# Altium PCB 03200904张晨06.PcbDoc
Units mil, origin at the board's own origin, x right, y up, seen from the top; angles counter-clockwise.
Board outline 2582.71 x 1795.31 mil, 2 copper layers (Top Layer, Bottom Layer); 37 components, 40 nets, 182 pads, 38 vias.
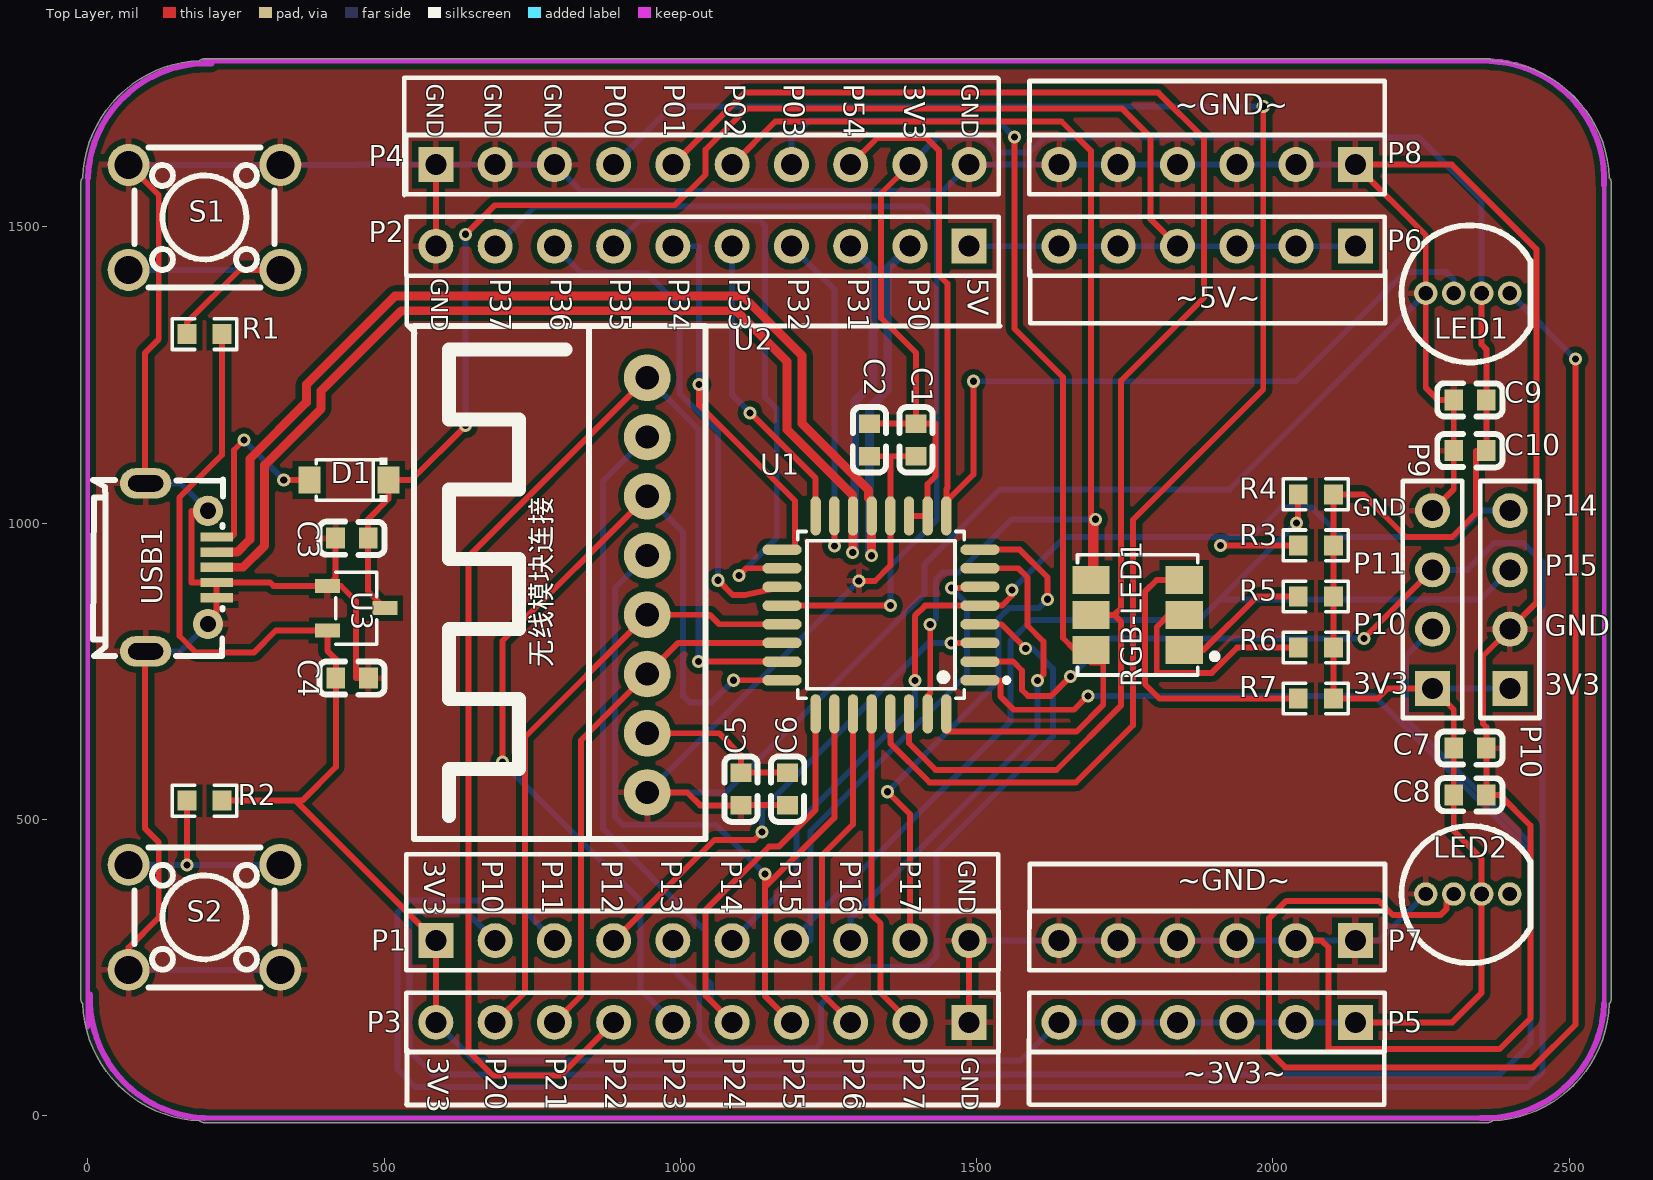
[diagram p0: Top Layer view]
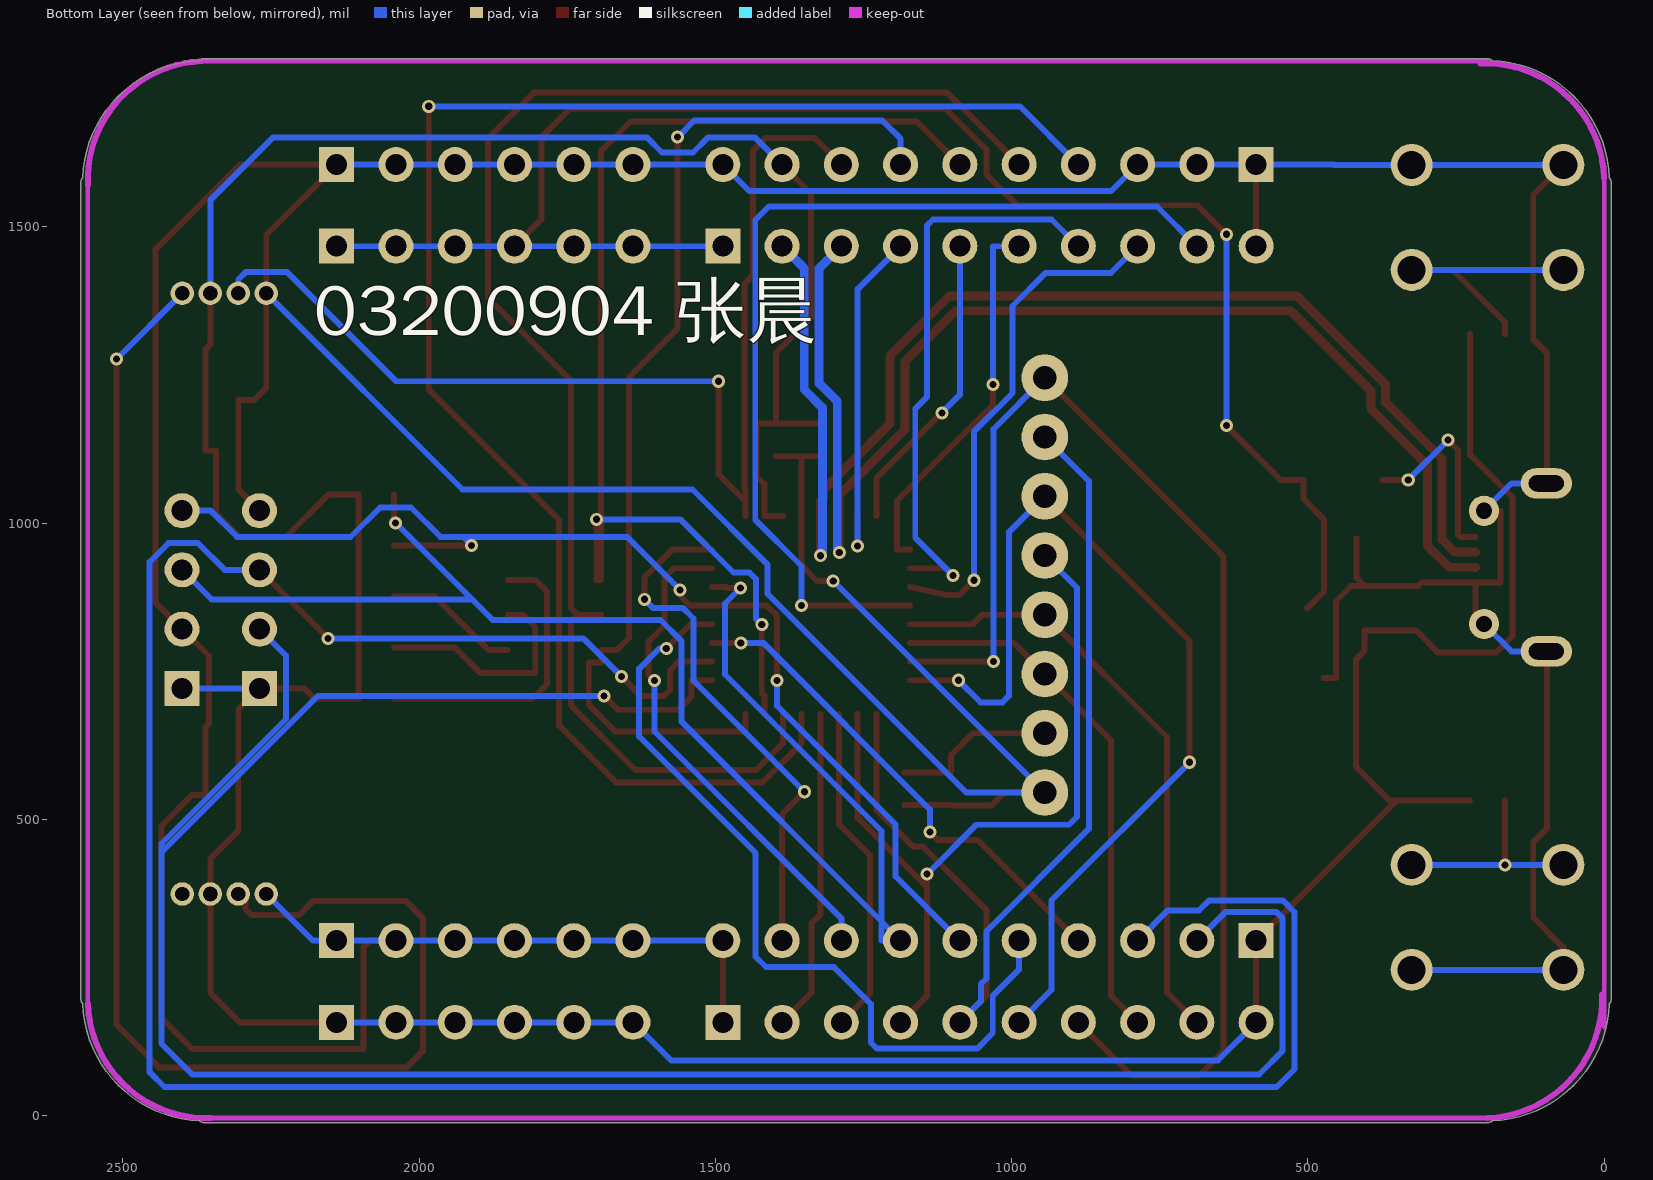
[diagram p1: Bottom Layer view, seen from below]

## Layer stack, top to bottom
Top Solder: solder mask 0.4, Solder Resist, Dk 3.5
Top Layer: signal copper 1.4
Dielectric 1: dielectric 12.6, FR-4, Dk 4.8
Bottom Layer: signal copper 1.4
Bottom Solder: solder mask 0.4, Solder Resist, Dk 3.5

## Board outline
-8.69,188.83 cw(c0,196.85) -11.83,196.85 -11.83,1574.8 cw(c0,1574.8) -8.69,1582.82 cw(c196.85,1574.8) 188.83,1780.35 cw(c196.85,1771.65) 196.85,1783.48 2362.2,1783.48 cw(c2362.2,1771.65) 2370.22,1780.35 cw(c2362.2,1574.8) 2567.75,1582.82 cw(c2559.06,1574.8) 2570.88,1574.8 2570.88,196.85 cw(c2559.06,196.85) 2567.75,188.83 cw(c2362.2,196.85) 2370.22,-8.69 cw(c2362.2,0) 2362.2,-11.83 196.85,-11.83 cw(c196.85,0) 188.83,-8.69 cw(c196.85,196.85)

## Design rules (kind name [scope] priority, off if disabled: settings)
Clearance [All] p1: gap=10 ignorepadtopadclearanceinfootprint=TRUE except(0: Arc-Hole Track-Hole SMDPad-Hole THPad-Hole Via-Hole Fill-Hole Poly-Hole Region-Hole Text-Hole)
DiffPairsRouting [All] p1: maxlimit=10 minlimit=10 mostfreqgap=10 toplayer_minwidth=15 toplayer_maxwidth=15 toplayer_prefwidth=15 bottomlayer_minwidth=15 bottomlayer_maxwidth=15 bottomlayer_prefwidth=15 maxuncoupledlength=500
PolygonConnect [All] p1: connectstyle=Relief reliefconductorwidth=10 reliefentries=4 polygonreliefangle="90 Angle" airgapwidth=10
RoutingVias [All] p1: holewidth=12 width=22 viastyle="Through Hole" minholewidth=12 minwidth=22 maxholewidth=12 maxwidth=22
SolderMaskExpansion [All] p1: expansion=4 istentingtop=FALSE
Width signal [InNetClass('signal')] p1: maxlimit=10 minlimit=10 preferedwidth=10
Width v [InNetClass('vcc')] p2: maxlimit=20 minlimit=10 preferedwidth=15
Width [All] p3: maxlimit=10 minlimit=10 preferedwidth=10
29 further rules are at their usual default settings.

## Classes and differential pairs
differential pair NewDifferentialPair1: +MCU_RXD -MCU_TXD

## Components (designator, comment, footprint, x,y, rotation, side; value= is the part's Value field where it differs from the comment)
C1 "Cap" C0603 1397.64,1140.25 r270 top value=0.1uF
C2 "Cap" C0603 1318.9,1140.25 r270 top value=0.1uF
C3 "Cap" C0603 445.49,974.41 r180 top value=10uF
C4 "Cap" C0603 446.1,738.19 r0 top value=10uF
C5 "Cap" C0603 1102.36,551.18 r90 top value=0.1uF
C6 "Cap" C0603 1181.1,551.18 r90 top value=10uF
C7 "Cap" C0603 2332.68,620.08 r0 top value=0.1uF
C8 "Cap" C0603 2332.68,541.34 r0 top value=0.1uF
C9 "Cap" C0603 2332.68,1207.74 r0 top value=10uF
C10 "Cap" C0603 2332.68,1122.05 r0 top value=10uF
D1 "1N5819W" SOD-123_L2.8-W1.8-LS3.7-RD 440.65,1072.83 r180 top
LED1 "WS2811-F8" WS2811-F8 2399.61,1387.8 r0 top
LED2 "WS2811-F8" WS2811-F8 2399.61,374.02 r0 top
P1 "Header 10" HDR1X10 587.4,295.28 r0 top
P2 "Header 10" HDR1X10 1487.4,1467.16 r180 top
P3 "Header 10" HDR1X10 1487.4,157.48 r180 top
P4 "Header 10" HDR1X10 587.4,1604.95 r0 top
P5 "Header 6" HDR1X6 2138.98,157.48 r180 top
P6 "Header 6" HDR1X6 2138.98,1467.16 r180 top
P7 "Header 6" HDR1X6 2138.98,295.28 r180 top
P8 "Header 6" HDR1X6 2138.98,1604.95 r180 top
P9 "Header 4" HDR1X4 2269.37,721.02 r90 top
P10 "Header 4" HDR1X4 2400,721.02 r90 top
R1 "Res1" R0603 196.85,1318.9 r0 top value=10K
R2 "Res1" R0603 196.85,531.5 r0 top value=10K
R3 "Res1" R0603 2072.33,1048.4 r180 top value=10K
R4 "Res1" R0603 2072.33,962.28 r180 top value=10K
R5 "Res1" R0603 2072.33,876.16 r0 top value=1K
R6 "Res1" R0603 2072.33,790.03 r0 top value=1K
R7 "Res1" R0603 2072.33,703.91 r0 top value=1K
RGB-LED1 "TC5050RGBF20-3CES-AF51" LED-SMD_6P-L5.0-W5.0-FD 1771.65,844.98 r180 top
S1 "SW-PB" SW-PB 196.85,1515.75 r0 top
S2 "SW-PB" SW-PB 196.85,334.65 r180 top
U1 "STC8H1K28-36I-LQFP32" STC8H1K28I-LQFP-32 1338.58,844.98 r90 top
U2 "无线传输模块" 无线传输 944.02,545.23 r0 top
U3 "BL8062CB3TR33" SOT-23-3_L2.9-W1.6-P1.90-LS2.8-BR 452.76,856.3 r180 top
USB1 "MICROXNJ" MICRO-USB-SMD_MICROXNJ 157.48,925.2 r270 top

## Footprints (in the part's own frame and the unit in brackets; to place one, negate y for a bottom-side part, rotate by r counter-clockwise, add the part's x,y. Pads: shape width x height; smd on the part's side, far side on the other; paste and mask are expansions set on the pad)
C0603 [mm]
  rect 0.8x0.9 smd: 1(-0.7,0) 2(0.7,0)
  silkscreen extent -1.41,-0.71 1.39,0.72
HDR1X4 [mm] "Connector; Header; 4 Position"
  rect 1.5x1.5 hole 0.9: 1(0,0)
  round 1.5 hole 0.9: 2(2.54,0) 3(5.08,0) 4(7.62,0)
  silkscreen extent -1.27,-1.27 8.89,1.27
HDR1X6 [mm] "Connector; Header; 6 Position"
  rect 1.5x1.5 hole 0.9: 1(0,0)
  round 1.5 hole 0.9: 2(2.54,0) 3(5.08,0) 4(7.62,0) 5(10.16,0) 6(12.7,0)
  silkscreen extent -1.27,-1.27 13.97,1.27
HDR1X10 [mm] "Connector; Header; 10 Position"
  rect 1.5x1.5 hole 0.9: 1(0,0)
  round 1.5 hole 0.9: 2(2.54,0) 3(5.08,0) 4(7.62,0) 5(10.16,0) 6(12.7,0) 7(15.24,0) 8(17.78,0) 9(20.32,0) 10(22.86,0)
  silkscreen extent -1.27,-1.27 24.13,1.27
LED-SMD_6P-L5.0-W5.0-FD [mm]
  rect 1.6x1.2 smd: 1(-2,1.5) 2(-2,0) 3(-2,-1.5) 4(2.001,-1.5) 5(2.001,0) 6(2.001,1.5)
  silkscreen extent -3.43,-2.58 2.58,2.58
MICRO-USB-SMD_MICROXNJ [mm]
  rect 0.4x1.4 smd: 1(-1.3,1.521) 2(-0.65,1.521) 3(0,1.521) 4(0.65,1.521) 5(1.3,1.521)
  round 1.3 hole 0.7: 6(2.425,1.149) 9(-2.425,1.149)
  oval 1.3x2.2 hole 0.7 slot 1.5 at 90 deg: 7(3.6,-1.521) 8(-3.6,-1.521)
  silkscreen extent -3.76,-3.78 3.8,1.79
R0603 [mil]
  rect 31.75x34.02 smd: 1(-29.66,0) 2(29.65,0)
  silkscreen extent -55,-26 55,26
SOD-123_L2.8-W1.8-LS3.7-RD [mm]
  rect 0.95x1.15 smd: 1(-1.692,0) 2(1.693,0)
  silkscreen extent -1.63,-0.94 1.41,0.94
SOT-23-3_L2.9-W1.6-P1.90-LS2.8-BR [mm]
  rect 1.07x0.6 smd: 1(1.235,-0.95) 2(1.235,0.95) 3(-1.235,0)
  silkscreen extent -0.88,-1.54 0.88,1.54
STC8H1K28I-LQFP-32 [mm] "LQFP-32_L7.0-W7.0-P0.80-LS9.0-BL"
  oval 0.448x1.684 smd: 1(-2.8,-4.242) 2(-2,-4.242) 3(-1.2,-4.242) 4(-0.4,-4.242) 5(0.4,-4.242) 6(1.2,-4.242) 7(2,-4.242) 8(2.8,-4.242) 17(2.8,4.242) 18(2,4.242) 19(1.2,4.242) 20(0.4,4.242) 21(-0.4,4.242) 22(-1.2,4.242) 23(-2,4.242) 24(-2.8,4.242)
  oval 1.684x0.448 smd: 9(4.242,-2.8) 10(4.242,-2) 11(4.242,-1.2) 12(4.242,-0.4) 13(4.242,0.4) 14(4.242,1.2) 15(4.242,2) 16(4.242,2.8) 25(-4.242,2.8) 26(-4.242,2) 27(-4.242,1.2) 28(-4.242,0.4) 29(-4.242,-0.4) 30(-4.242,-1.2) 31(-4.242,-2) 32(-4.242,-2.8)
  silkscreen extent -3.58,-5.48 3.58,3.58
SW-PB [mm] "SW-TH_4P-L6.0-W6.0-P4.50-LS6.5"
  round 1.8 hole 1.2: 1(-3.25,2.25) 1(3.25,2.25) 2(-3.25,-2.25) 2(3.25,-2.25)
  silkscreen extent -3,-3 3,3
WS2811-F8 [mm]
  round 1 hole 0.61 paste+0: 1(0,0) 3(-2.4,0) 4(-3.6,0)
  round 1 hole 0.61 slot 0.62 at 0 deg paste+0: 2(-1.2,0)
  silkscreen extent -4.64,-2.97 0.89,2.91
无线传输 [mm]
  round 2 hole 1 paste+0: 1(0,0) 2(0,2.54) 3(0,5.08) 4(0,7.62) 5(0,10.16) 6(0,12.7) 7(0,15.24) 8(0,17.78)
  silkscreen extent -10,-2 2.5,20

## Part data
C1 C2 C3 C4 C5 C6 C7 C8 C9 C10: "Capacitor", LatestRevisionDate=17-Jul-2002, LatestRevisionNote="Re-released for DXP Platform.", PackageDescription="Radial Cap, Thru-Hole; 2 Leads; 0.3 in Pin Spacing", PackageReference=RAD-0.3, Published=8-Jun-2000, Publisher="Altium Limited"
D1: library part 1N5819W_C727115, BOM_JLCPCB Part Class="Extended Part", BOM_Manufacturer=TWGMC, BOM_Manufacturer Part=1N5819W, BOM_Supplier=LCSC, BOM_Supplier Part=C727115, Contributor=LCSC, spicePre=D, spiceSymbolName=1N5819W_C727115
P1 P2 P3 P4: "Header, 10-Pin", LatestRevisionDate=17-Jul-2002, LatestRevisionNote="Re-released for DXP Platform.", Publisher="Altium Limited"
P5 P6 P7 P8: "Header, 6-Pin", LatestRevisionDate=17-Jul-2002, LatestRevisionNote="Re-released for DXP Platform.", Publisher="Altium Limited"
P9 P10: "Header, 4-Pin", LatestRevisionDate=17-Jul-2002, LatestRevisionNote="Re-released for DXP Platform.", Publisher="Altium Limited"
R1 R2 R3 R4 R5 R6 R7: library part Res, "Resistor", LatestRevisionDate=17-Jul-2002, LatestRevisionNote="Re-released for DXP Platform.", PackageDescription="Axial Device, Thru-Hole; 2 Leads; 0.3 in Pin Spacing", PackageReference=AXIAL-0.3, Published=8-Jun-2000, Publisher="Altium Limited"
RGB-LED1: BOM_JLCPCB Part Class="Extended Part", BOM_Manufacturer=TCWIN, BOM_Manufacturer Part=TC5050RGBF20-3CES-AF51, BOM_Supplier=LCSC, BOM_Supplier Part=C784541, Contributor=LCSC, spicePre=L, spiceSymbolName=TC5050RGBF20-3CES-AF51
S1 S2: "Switch", LatestRevisionDate=17-Jul-2002, LatestRevisionNote="Re-released for DXP Platform.", PackageDescription="Switch; 2 Leads", PackageReference=SPST-2, Published=24-Mar-1999, Publisher="Altium Limited"
U1: BOM_JLCPCB Part Class="Extended Part", BOM_Manufacturer="STC Micro", BOM_Manufacturer Part=STC8H1K28-36I-LQFP32, BOM_Supplier=LCSC, BOM_Supplier Part=C914618, Contributor=LCSC, spicePre=U, spiceSymbolName=STC8H1K28-36I-LQFP32
U3: BOM_JLCPCB Part Class="Extended Part", BOM_Manufacturer="BL(Shanghai Belling)", BOM_Manufacturer Part=BL8062CB3TR33, BOM_Supplier=LCSC, BOM_Supplier Part=C692265, Contributor=LCSC, spicePre=U, spiceSymbolName=BL8062CB3TR33
USB1: BOM_JLCPCB Part Class="Extended Part", BOM_Manufacturer="SHOU HAN", BOM_Manufacturer Part=MicroXNJ, BOM_Supplier=LCSC, BOM_Supplier Part=C404969, Contributor=LCSC, spicePre=U, spiceSymbolName=MICROXNJ

## Via types
v1: diameter 22, hole 12, Top Layer to Bottom Layer, 38 vias

## Nets (pads, with @x,y where several pads share a name; then routed paths per layer and width w, separated by ;. In a path a pad name is that pad's centre, name@x,y a point inside that pad or via, vN(x,y) a via of type N, cw(c..) or ccw(c..) an arc to the next point about the centre after c; other vN are vias at no path point)
+3.3V: C1.1 C2.1 C4.1 C7.1 C8.1 C9.2 C10.2 LED1.2 LED2.2 P1.1 P3.10 P4.9 P5.1 P5.2 P5.3 P5.4 P5.5 P5.6 P9.1 P10.1 R1.2 R2.2 R3.1 R4.1 R5.2 R6.2 R7.2 U1.10 U1.11 U3.2 | length 7447.6
  Top Layer w10: R2.2 351.18,531.5 ; R1.2 226.51,1115.17 154.68,1043.35 154.68,809.35 182.68,781.35 280.13,781.35 317.68,818.9 U3.2 404.14,784.75 418.55,770.35 C4.1 418.55,588.35 361.7,531.5 351.18,531.5 ; P3.10 P1.1 351.18,531.5 ; C2.1 C1.1 ; U1.11 U1.10 1417.32,1065.92 1430.68,1079.28 1430.68,1167.81 C1.1 ; P4.9 1338.68,1556.23 1338.68,1346.31 1397.64,1287.35 C1.1 ; P5.1 2302.68,157.48 2352.36,207.17 LED2.2 2352.36,433.35 2305.12,480.59 C8.1 C7.1 2305.12,685.27 P9.1 2193.79,721.02 2176.68,703.91 R7.2 R6.2 R5.2 R4.1 R3.1 2152.62,1048.4 2224.68,976.35 2302.68,976.35 2342.68,1016.35 2342.68,1122.05 C10.2 C9.2 2360.23,1293.35 2352.36,1301.22 LED1.2
  Bottom Layer w10: P3.10 651.93,92.95 1574.45,92.95 P5.6 P5.5 P5.4 P5.3 P5.2 P5.1 ; P4.9 1432.79,1650.35 1512.68,1650.35 1537.68,1625.35 1590.17,1625.35 1615.17,1650.35 2246.68,1650.35 2352.36,1544.66 LED1.2 ; P9.1 P10.1
+5: C3.1 D1.1 P2.1 P6.1 P6.2 P6.3 P6.4 P6.5 P6.6 U3.3 | length 2876.6
  Top Layer w10: U3.3 473.05,884.63 C3.1 473.05,1006.35 507.28,1040.58 D1.1 546.17,1072.83 v1(637.68,1164.35) ; v1(637.68,1487.35) 686.68,1536.35 990.68,1536.35 1042.68,1588.35 1042.68,1630.35 1111.68,1699.35 1745.68,1699.35 1793.68,1651.35 1793.68,1512.46 P6.4
  Bottom Layer w10: v1(637.68,1164.35) v1(637.68,1487.35) ; P2.1 P6.6 P6.5 P6.4 P6.3 P6.2 P6.1
GND: C1.2 C2.2 C3.2 C4.2 C5.1 C6.1 C7.2 C8.2 C9.1 C10.1 LED1.4 LED2.4 P1.10 P2.10 P3.1 P4.1 P4.2 P4.3 P4.10 P7.1 P7.2 P7.3 P7.4 P7.5 P7.6 P8.1 P8.2 P8.3 P8.4 P8.5 P8.6 P9.4 P10.2 S1.1 S2.1 U1.12 U2.1 U3.1 USB1.4 USB1.5 USB1.6 USB1.7 USB1.8 USB1.9 | length 11377.9
  Top Layer w10: S2.1@68.9,246.06 68.9,283.57 119.68,334.35 119.68,461.35 96.68,484.35 96.68,783.47 USB1.7 ; S1.1@68.9,1604.33 119.68,1553.55 119.68,1310.35 96.68,1287.35 96.68,1066.93 USB1.8 ; USB1.6 217.38,844.39 USB1.5 USB1.4 ; USB1.9 174.68,1020.67 174.68,899.61 USB1.4 ; C3.2 417.94,907.5 U3.1 ; C4.2 452.68,738.19 452.68,868.35 427.32,893.7 U3.1 ; P2.10 P4.1 ; U2.1 1011.68,545.23 1033.28,523.63 C5.1 1102.36,524.35 1181.1,524.35 C6.1 ; v1(1301.14,902.35) 1328.33,902.35 1354.33,928.35 U1.12 1354.33,1109.35 1357.68,1112.7 ; C2.2 1357.68,1112.7 ; C1.2 1357.68,1112.7 ; P3.1 P1.10 ; P7.2 2082.68,295.28 2093.68,284.28 2093.68,112.35 2382.68,112.35 2434.68,164.35 2434.68,489.34 2382.68,541.34 C8.2 C7.2 2360.23,655.79 2354.68,661.35 2354.68,775.7 P10.2 2444.68,865.7 2444.68,1462.35 2302.07,1604.95 P8.1 2257.87,1486.06 LED1.4 2257.87,1228.15 2278.29,1207.74 C9.1 C10.1 2305.12,1056.78 P9.4 ; USB1.4 307.68,899.61 313.59,893.7 U3.1
  Bottom Layer w10: S2.1@68.9,246.06 S2.1@324.8,246.06 ; S1.1@68.9,1604.33 324.8,1604.33 455.68,1604.33 456.3,1604.95 P4.1 P4.2 P4.3 832.01,1560.35 1442.79,1560.35 P4.10 P8.6 P8.5 P8.4 P8.3 P8.2 P8.1 ; USB1.7 156.45,783.47 USB1.6 ; USB1.8 156.45,1066.93 USB1.9 ; v1(1301.14,902.35) U2.1 1076.56,545.23 1411.68,880.35 1411.68,929.89 1538.49,1056.71 1926.79,1056.71 LED1.4 ; P1.10 P7.6 P7.5 P7.4 P7.3 P7.2 P7.1 2179.13,295.28 LED2.4
LED-B: P4.7 RGB-LED1.6 U1.32 | length 1805.5
  Top Layer w10: U1.32 1448.82,648.35 1668.68,648.35 1713.68,693.35 1713.68,764.35 1692.89,764.35 RGB-LED1.6 1665.68,785.92 1645.68,805.92 1645.68,1246.35 1563.68,1328.35 v1(1563.68,1651.35)
  Bottom Layer w10: P4.7 1187.4,1648.35 1218.4,1679.35 1535.68,1679.35 v1(1563.68,1651.35)
LED-G: P4.6 RGB-LED1.4 U1.31 | length 2034.5
  Top Layer w10: P4.6 1160.13,1677.68 1643.34,1677.68 1692.68,1628.35 1692.86,1006.34 RGB-LED1.4 1700.68,904.03 v1(1700.68,1006.35) ; U1.31 1417.32,708.39 1421.68,712.75 v1(1421.68,828.7)
  Bottom Layer w10: v1(1421.68,828.7) 1431.68,838.7 1431.68,905.54 1442.68,916.54 1469.52,916.54 1559.32,1006.35 v1(1700.68,1006.35)
LED-R: P4.5 RGB-LED1.5 U1.30 | length 2513.7
  Top Layer w10: P4.5 1108.79,1726.35 1806.68,1726.35 1883.68,1649.35 1883.68,1380.35 1743.92,1240.59 1743.92,856.59 1732.31,844.98 ; U1.30 1385.83,628.35 1430.83,583.35 1634.68,583.35 1743.92,692.59 1743.92,833.37 1732.31,844.98 ; RGB-LED1.5 1732.31,844.98
MCU_RXD: P2.2 U1.13 USB1.2 | length 2244.3
  Top Layer w15: USB1.2 217.59,951.01 252.19,951.01 273.48,972.3 273.48,1108.16 368.84,1203.52 368.84,1233.52 518.58,1383.27 1104.84,1383.27 1205.19,1282.92 1205.19,1168.19 1317.66,1055.72 1317.66,1042.21 1322.84,1037.03 U1.13 v1(1322.84,944.88)
  Bottom Layer w15: v1(1322.84,944.88) 1321.5,946.22 1321.5,951.17 1319.38,953.29 1319.38,1194.9 1349.9,1225.42 1349.9,1429.66 P2.2
MCU_TXD: P2.3 U1.14 USB1.3 | length 2190
  Top Layer w15: USB1.3 217.6,925.42 261.95,925.42 298.48,961.94 298.48,1097.81 393.84,1193.17 393.84,1223.17 528.94,1358.27 1094.49,1358.27 1180.19,1272.56 1180.19,1157.83 1290.84,1047.19 1290.84,1012.49 U1.14 1291.09,1011.73 1291.09,950.47 v1(1290.83,950.21)
  Bottom Layer w15: P2.3 1324.9,1429.66 1324.9,1235.78 1294.38,1205.26 1294.38,955.66 1290.83,952.11 v1(1290.83,950.21)
NetC5_2: C5.2 C6.2 U2.2 | length 282
  Top Layer w10: U2.2 1065.48,645.23 1102.36,608.35 C5.2 C6.2
NetLED1_1: LED1.1 LED2.3 | length 2419.4
  Top Layer w10: LED2.3 2292.68,361.57 2292.68,348.35 2282.68,338.35 2202.68,338.35 2178.68,362.35 2022.68,362.35 1993.68,333.35 1993.68,108.35 2020.68,81.35 2438.68,81.35 2510.68,153.35 v1(2510.68,1276.72)
  Bottom Layer w10: LED1.1 v1(2510.68,1276.72)
NetR1_1: R1.1 S1.2 | length 469.8
  Top Layer w10: R1.1 167.2,1338.35 256.01,1427.16 S1.2@324.8,1427.16
  Bottom Layer w10: S1.2@68.9,1427.16 S1.2@324.8,1427.16
NetR2_1: R2.1 S2.2 | length 364.2
  Top Layer w10: v1(167.2,423.23) R2.1
  Bottom Layer w10: S2.2@68.9,423.23 v1(167.2,423.23) S2.2@324.8,423.23
NetR5_1: R5.1 RGB-LED1.1 | length 229.6
  Top Layer w10: RGB-LED1.1 1883.25,785.92 1973.49,876.16 R5.1
NetR6_1: R6.1 RGB-LED1.2 | length 388.7
  Top Layer w10: RGB-LED1.2 1824.35,844.98 1803.92,824.54 1803.92,747.3 1896.94,747.3 1939.68,790.03 R6.1
NetR7_1: R7.1 RGB-LED1.3 | length 499.5
  Top Layer w10: RGB-LED1.3 1803.68,904.03 1783.92,884.27 1783.92,728.35 1808.35,703.91 R7.1
NRF2401_CE: P3.8 U1.22 U2.3 | length 901.9
  Top Layer w10: P3.8 832.27,202.35 832.27,633.48 U2.3 996.52,797.73 U1.22
NRF2401_CSN: P3.9 U1.21 U2.4 | length 1028.2
  Top Layer w10: P3.9 737.68,207.76 737.68,638.89 U2.4 1049.68,845.23 1065.68,829.23 U1.21
NRF2401_IRQ: P3.7 U1.23 U2.8 | length 2216.5
  Top Layer w10: P3.7 797.27,67.35 683.68,67.35 642.68,108.35 642.68,943.89 U2.8 ; v1(1030.68,766.24) U1.23
  Bottom Layer w10: U2.8 1030.68,1158.58 v1(1030.68,766.24)
NRF2401_MISO: P3.5 U1.25 U2.7 | length 1734.5
  Top Layer w10: P3.5 1042.68,202.2 1042.68,347.15 1149.46,453.93 1166.27,453.93 1228.35,516.02 U1.25
  Bottom Layer w10: U2.7 869.65,1070.86 869.65,483.89 1042.54,311 1042.54,231.4 1051.93,222.01 1051.93,192.95 P3.5
NRF2401_MOSI: P3.6 U1.24 U2.6 | length 1657
  Top Layer w10: v1(699.68,596.35) 699.68,800.89 U2.6 ; v1(1089.91,734.74) U1.24
  Bottom Layer w10: v1(699.68,596.35) 932.68,363.35 932.68,212.2 P3.6 ; U2.6 1004.68,984.58 1004.68,708.35 1015.55,697.48 1052.65,697.48 v1(1089.91,734.74)
NRF2401_SCLK: P3.4 U1.26 U2.5 | length 1366.5
  Top Layer w10: v1(1142.68,407.86) 1142.68,385.35 ; P3.4 1142.68,202.2 1142.68,385.35 ; U1.26 1259.84,502.51 1142.68,385.35
  Bottom Layer w10: U2.5 889.65,890.86 889.65,504.35 903.14,490.86 1059.68,490.86 v1(1142.68,407.86)
P00: P4.4 U1.29 | length 2799.2
  Top Layer w10: U1.29 1354.33,628.35 1420.33,562.35 1667.68,562.35 1763.92,658.59 1763.92,1005.59 1983.68,1225.35 v1(1983.68,1703.35)
  Bottom Layer w10: P4.4 985.79,1703.35 v1(1983.68,1703.35)
P10: P1.2 P9.2 U1.1 | length 4213.1
  Top Layer w10: U1.1 1540.45,734.74 1540.45,707.11 1562.68,684.88 1664.22,684.88 v1(1687.68,708.35)
  Bottom Layer w10: P1.2 639.33,343.35 552.68,343.35 542.68,333.35 542.68,109.35 582.68,69.35 2382.68,69.35 2434.68,121.35 2434.68,444.35 ; v1(1687.68,708.35) 2170.68,708.35 2434.68,444.35 ; P9.2 2224.68,776.33 2224.68,669.35 2434.68,459.35 2434.68,444.35
P11: P1.3 P9.3 U1.2 | length 4494.4
  Top Layer w10: U1.2 1561.68,766.24 1576.68,751.24 1576.68,718.35 1586.68,708.35 1625.68,708.35 v1(1658.68,741.35) ; v1(2153.69,805.35) P9.3
  Bottom Layer w10: P1.3 736.33,346.35 683.68,346.35 666.68,363.35 542.68,363.35 522.68,343.35 522.68,78.35 552.68,48.35 2429.68,48.35 2454.68,73.35 2454.68,934.35 2422.68,966.35 2373.47,966.35 2328.15,921.02 P9.3 ; v1(1658.68,741.35) 1722.68,805.35 v1(2153.69,805.35)
P12: P1.4 U1.3 | length 848.6
  Top Layer w10: P1.4 1057.28,465.16 1124.49,465.16 v1(1137.68,478.35) ; v1(1457.06,797.73) U1.3
  Bottom Layer w10: v1(1137.68,478.35) 1137.68,516.39 1419.02,797.73 v1(1457.06,797.73)
P13: P1.5 U1.4 | length 1409.6
  Top Layer w10: U1.4 1541.91,829.23 v1(1582.8,788.35)
  Bottom Layer w10: P1.5 987.4,246.87 1031.93,202.35 1031.93,139.29 1058.27,112.95 1227.28,112.95 1237.68,123.35 1237.68,188.35 1300.08,250.75 1414.67,250.75 1432.27,268.35 1432.27,443.35 1628.68,639.76 1628.68,754.35 1594.68,788.35 v1(1582.8,788.35)
P14: P1.6 P10.4 R4.2 U1.5 | length 1951.6
  Top Layer w10: v1(1395.68,734.35) 1395.68,843.35 1413.06,860.72 U1.5 1542.68,860.72 1559.68,877.72 v1(1559.68,887.35) ; v1(1911.68,962.28) R4.2
  Bottom Layer w10: P1.6 1195.68,403.55 1195.68,491.35 1395.68,691.35 v1(1395.68,734.35) ; v1(1559.68,887.35) 1648.68,976.35 1925.75,976.35 ; v1(1911.68,962.28) 1925.75,976.35 ; P10.4 2351.68,1021.02 2307,976.35 2115.7,976.35 2065.7,1026.35 2013.68,1026.35 1963.68,976.35 1925.75,976.35
P15: P1.7 P10.3 R3.2 U1.6 | length 2579.2
  Top Layer w10: v1(1457.68,890.35) 1479.8,890.35 1481.68,892.22 U1.6 ; v1(2039.68,1000.35) 2042.68,1003.35 R3.2
  Bottom Layer w10: v1(1457.68,890.35) 1483.68,864.35 1483.68,744.35 1219.68,480.35 1219.68,327.55 ; v1(2039.68,1000.35) 1910.68,871.35 ; P10.3 2350.32,871.35 1910.68,871.35 ; 1219.68,327.55 1556.8,664.67 1556.8,800.46 1592.68,836.35 1875.68,836.35 1910.68,871.35 ; 1219.68,327.55 P1.7 1219.68,295.28 1219.68,327.55
P16: P1.8 U1.7 | length 845.5
  Top Layer w10: U1.7 1570.37,923.72 1585.74,908.35 1585.74,827.01 1612.68,800.07 1612.68,744.35 v1(1602.68,734.35)
  Bottom Layer w10: P1.8 1287.4,333.07 1602.68,648.35 v1(1602.68,734.35)
P17: P1.9 U1.8 | length 903.5
  Top Layer w10: v1(1349.68,546.52) 1387.4,508.8 P1.9 ; U1.8 1572.81,955.21 1619.68,908.35 v1(1619.68,871.35)
  Bottom Layer w10: v1(1349.68,546.52) 1536.8,733.64 1536.8,838.84 1554.3,856.35 1604.68,856.35 v1(1619.68,871.35)
P26: P3.3 U1.27 | length 562.5
  Top Layer w10: P3.3 1238.68,206.2 1238.68,438.88 1291.34,491.54 U1.27
P27: P3.2 U1.28 | length 547.2
  Top Layer w10: U1.28 1322.84,339.19 1337.68,324.35 1337.68,207.2 P3.2
P32: P2.4 U1.15 | length 586.5
  Top Layer w10: v1(1259.84,961.35) U1.15
  Bottom Layer w10: P2.4 1259.84,1394.72 v1(1259.84,961.35)
P33: P2.5 U1.16 | length 513.6
  Top Layer w10: v1(1117.68,1186.02) 1228.35,1075.35 U1.16
  Bottom Layer w10: P2.5 1087.4,1216.29 v1(1117.68,1186.02)
P34: P2.6 U1.17 | length 645.4
  Top Layer w10: v1(1031.68,1233.73) 1031.68,1199.35 1193.68,1037.35 1193.68,955.21 U1.17
  Bottom Layer w10: P2.6 1031.68,1467.16 v1(1031.68,1233.73)
P35: P2.7 U1.18 | length 982
  Top Layer w10: v1(1098.68,911.35) 1111.05,923.72 U1.18
  Bottom Layer w10: P2.7 932.59,1512.35 1132.68,1512.35 1142.68,1502.35 1142.68,1213.02 1162.68,1193.02 1162.68,975.35 v1(1098.68,911.35)
P36: P2.8 U1.19 | length 862.7
  Top Layer w10: v1(1063.68,903.47) 1088.8,878.35 1108.8,878.35 U1.19
  Bottom Layer w10: P2.8 832.21,1422.35 942.68,1422.35 998.68,1366.35 998.68,1219.35 1063.68,1154.35 v1(1063.68,903.47)
P37: P2.9 U1.20 | length 1648.7
  Top Layer w10: U1.20 v1(1354.68,860.72)
  Bottom Layer w10: P2.9 754.59,1534.35 1409.68,1534.35 1432.68,1511.35 1432.68,1005.6 1354.68,927.6 v1(1354.68,860.72)
P54: LED1.3 P4.8 U1.9 | length 1936.3
  Top Layer w10: P4.8 1331.93,1649.48 1415.54,1649.48 1436.68,1628.35 1436.68,1418.35 1450.68,1404.35 1450.68,1059.35 1448.82,1057.49 U1.9@1448.82,1036.35 ; U1.9 U1.9@1448.82,1036.35 ; v1(1494.68,1239.35) 1494.68,1082.2 U1.9@1448.82,1036.35
  Bottom Layer w10: v1(1494.68,1239.35) 2038.68,1239.35 2222.68,1423.35 2292.68,1423.35 2305.12,1410.9 LED1.3
VBus: D1.2 USB1.1 | length 336.1
  Top Layer w10: USB1.1 242.71,976.38 246.68,980.35 246.68,1123.35 v1(263.42,1140.09) ; v1(330.68,1072.83) D1.2
  Bottom Layer w10: v1(263.42,1140.09) v1(330.68,1072.83)
pads on no net: LED2.1

## Polygon pours and split planes (outlines as drawn)
GND on Top Layer "GND_L01_P001" (solid, pour order 1): -8.69,188.83 cw(c0,196.85) -11.83,196.85 -11.83,1574.8 cw(c0,1574.8) -8.69,1582.82 cw(c196.85,1574.8) 188.83,1780.35 cw(c196.85,1771.65) 196.85,1783.48 2362.2,1783.48 cw(c2362.2,1771.65) 2370.22,1780.35 cw(c2362.2,1574.8) 2567.75,1582.82 cw(c2559.06,1574.8) 2570.88,1574.8 2570.88,196.85 cw(c2559.06,196.85) 2567.75,188.83 cw(c2362.2,196.85) 2370.22,-8.69 cw(c2362.2,0) 2362.2,-11.83 196.85,-11.83 cw(c196.85,0) 188.83,-8.69 cw(c196.85,196.85)

## Keep-outs
Keep-Out Layer:
  lines w8: 0,149.61 0,1602.36 ; 177.17,-3.94 2366.14,-3.94 ; 196.85,1779.53 2385.83,1779.53 ; 2559.06,169.29 2559.06,1578.74
  lines w10: 0,1582.68 cw(c200.79,1574.8) 208.66,1775.59 ; 3.94,204.72 ccw(c204.72,196.85) 196.85,-3.94 ; 2350.39,-3.94 ccw(c2358.27,196.85) 2559.06,188.98 ; 2366.14,1779.53 cw(c2358.27,1578.74) 2559.06,1570.87

## Silkscreen, mask and mechanical layers (free items; w line width, h text height)
Top Overlay:
  lines w8: 534.18,1553.75 534.18,1751.7 1534.48,1751.7 1537.37,1748.82 1537.37,1652.73 ; 537.28,19.37 538.57,18.07 ; 537.28,341.65 537.28,441.13 1536.44,441.13 ; 538.03,1416.35 538.03,1334.67 ; 552.44,1320.26 538.03,1334.67 ; 1536.44,440.04 1536.44,19.36 1535.15,18.07 538.57,18.07 ; 1537.37,1424.98 1537.37,1334.65 1539.27,1332.75 1483.54,1332.75 ; 1588.34,128.57 1588.34,20.3 1590.52,18.12 2187.76,18.12 2187.76,126.39 ; 1589.11,1643.54 1589.11,1745.89 2188.52,1745.89 2188.52,1643.54 ; 1589.57,316.15 1589.57,424.42 2188.98,424.42 2188.98,316.15 ; 1590.32,1426.13 1590.32,1337.12 2189.73,1337.12 2189.73,1426.13 ; 538.03,1334.67 539.95,1332.75 1483.54,1332.75 ; 538.57,18.07 538.57,112.18 ; 538.57,112.18 538.57,112.18 ; 1483.54,1332.75 1483.54,1332.75
  text "GND" at 561.53,1741.76 h50 r270
  text "GND" at 659.34,1741.76 h50 r270
  text "GND" at 761.33,1741.76 h50 r270
  text "P00" at 861.7,1741.76 h60 r270
  text "P01" at 961.1,1741.76 h60 r270
  text "P02" at 1063.1,1741.76 h60 r270
  text "P03" at 1162.5,1741.76 h60 r270
  text "P54" at 1263.63,1741.76 h60 r270
  text "3V3" at 1365.62,1741.76 h60 r270
  text "GND" at 1465.08,1741.76 h50 r270
  text "~GND~" at 1834.19,1677.61 h60
  text "GND" at 569.41,1413.02 h50 r270
  text "P37" at 667.31,1413.02 h60 r270
  text "P36" at 769.31,1413.02 h60 r270
  text "P35" at 869.57,1413.02 h60 r270
  text "P34" at 968.97,1413.02 h60 r270
  text "P33" at 1070.97,1413.02 h60 r270
  text "P32" at 1170.37,1413.02 h60 r270
  text "P31" at 1271.5,1413.02 h60 r270
  text "P30" at 1373.5,1413.02 h60 r270
  text "5V" at 1473.05,1413.02 h60 r270
  text "~5V~" at 1835.4,1351.94 h60
  text "GND" at 2135.61,1002.29 h50
  text "P14" at 2458.53,1000.73 h60
  text "P11" at 2135.61,902.22 h60
  text "P15" at 2458.53,899.34 h60
  text "P10" at 2135.61,800.84 h60
  text "GND" at 2458.53,798.21 h60
  text "无线模块连接" at 793.77,755.91 h60 r90
  text "3V3" at 2135.61,699.71 h60
  text "3V3" at 2458.53,698.81 h60
  text "3V3" at 556.13,431.02 h60 r270
  text "P10" at 653.94,431.02 h60 r270
  text "P11" at 755.32,431.02 h60 r270
  text "P12" at 855.59,431.02 h60 r270
  text "P13" at 955.6,431.02 h60 r270
  text "P14" at 1056.98,431.02 h60 r270
  text "P15" at 1156.99,431.02 h60 r270
  text "P16" at 1258.13,431.02 h60 r270
  text "P17" at 1359.51,431.02 h60 r270
  text "GND" at 1459.57,431.02 h50 r270
  text "~GND~" at 1838.95,368.43 h60
  text "3V3" at 561.63,98.43 h60 r270
  text "P20" at 659.44,98.43 h60 r270
  text "P21" at 760.82,98.43 h60 r270
  text "P22" at 861.09,98.43 h60 r270
  text "P23" at 961.1,98.43 h60 r270
  text "P24" at 1062.49,98.43 h60 r270
  text "P25" at 1162.5,98.43 h60 r270
  text "P26" at 1263.63,98.43 h60 r270
  text "P27" at 1365.01,98.43 h60 r270
  text "GND" at 1465.07,98.43 h50 r270
  text "~3V3~" at 1847.69,42.38 h60
Bottom Overlay:
  text "03200904 张晨" at 2177.17,1288.64 h150
Mechanical 1:
  lines w23.62: 0,196.85 0,1574.8 ; 2.98,196.85 ccw(c196.85,196.85) 196.85,2.98 ; 2.98,1574.8 cw(c196.85,1574.8) 196.85,1768.68 ; 196.85,0 2362.21,0 ; 196.85,1771.65 2362.23,1768.66 cw(c2362.23,1574.8) 2556.08,1574.8 ; 2362.2,2.98 ccw(c2362.2,196.85) 2556.08,196.85 ; 2559.06,173.23 2559.06,1574.8 ; 2556.08,1574.8 2556.08,1574.8